# Altium PCB DevBoard.PcbDoc (part 1 of 2)
Units mil, origin at the board's own origin, x right, y up, seen from the top; angles counter-clockwise.
Board outline 3635 x 2820 mil, 4 copper layers (Top Layer, Layer 1, Layer 2, Bottom Layer), stack 22.334 mil thick; 84 components, 151 nets, 484 pads, 93 vias.
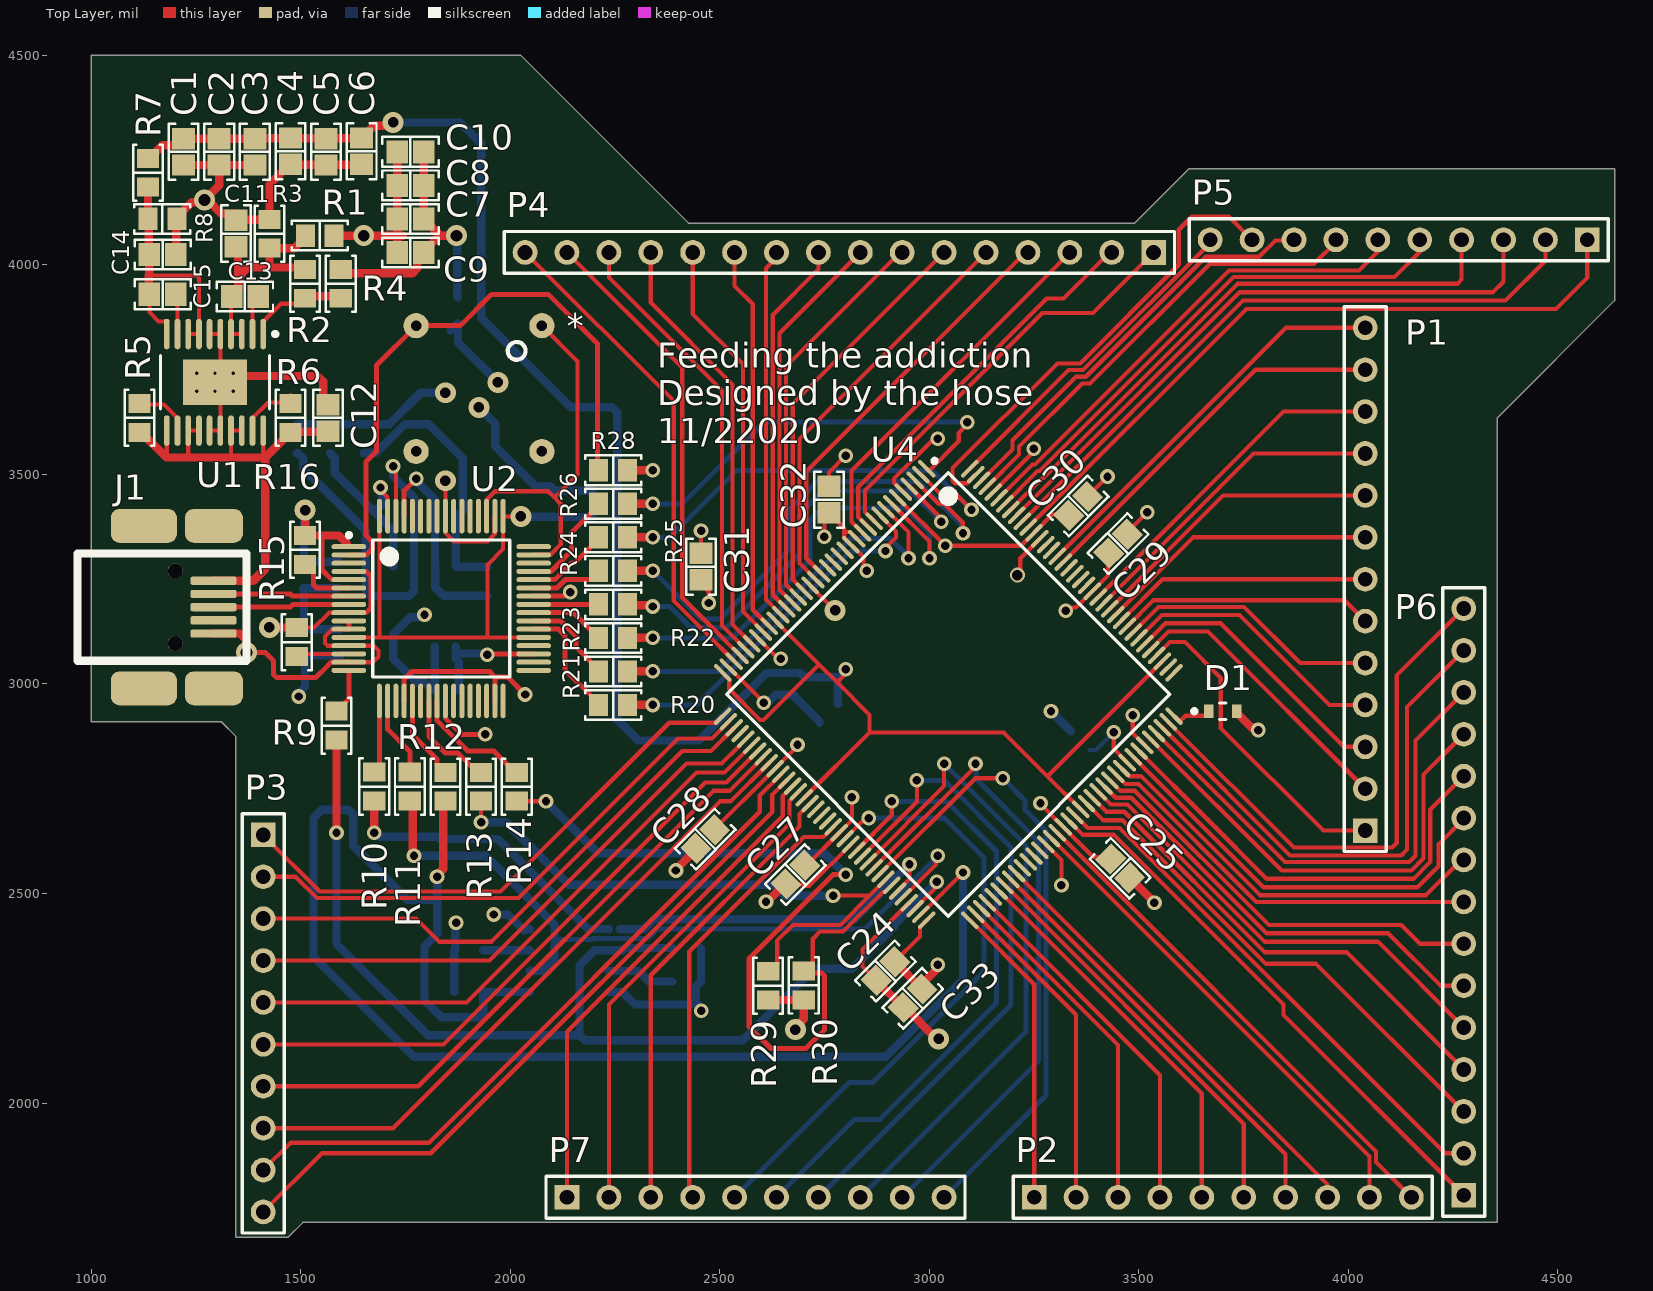
[diagram p0: Top Layer view]
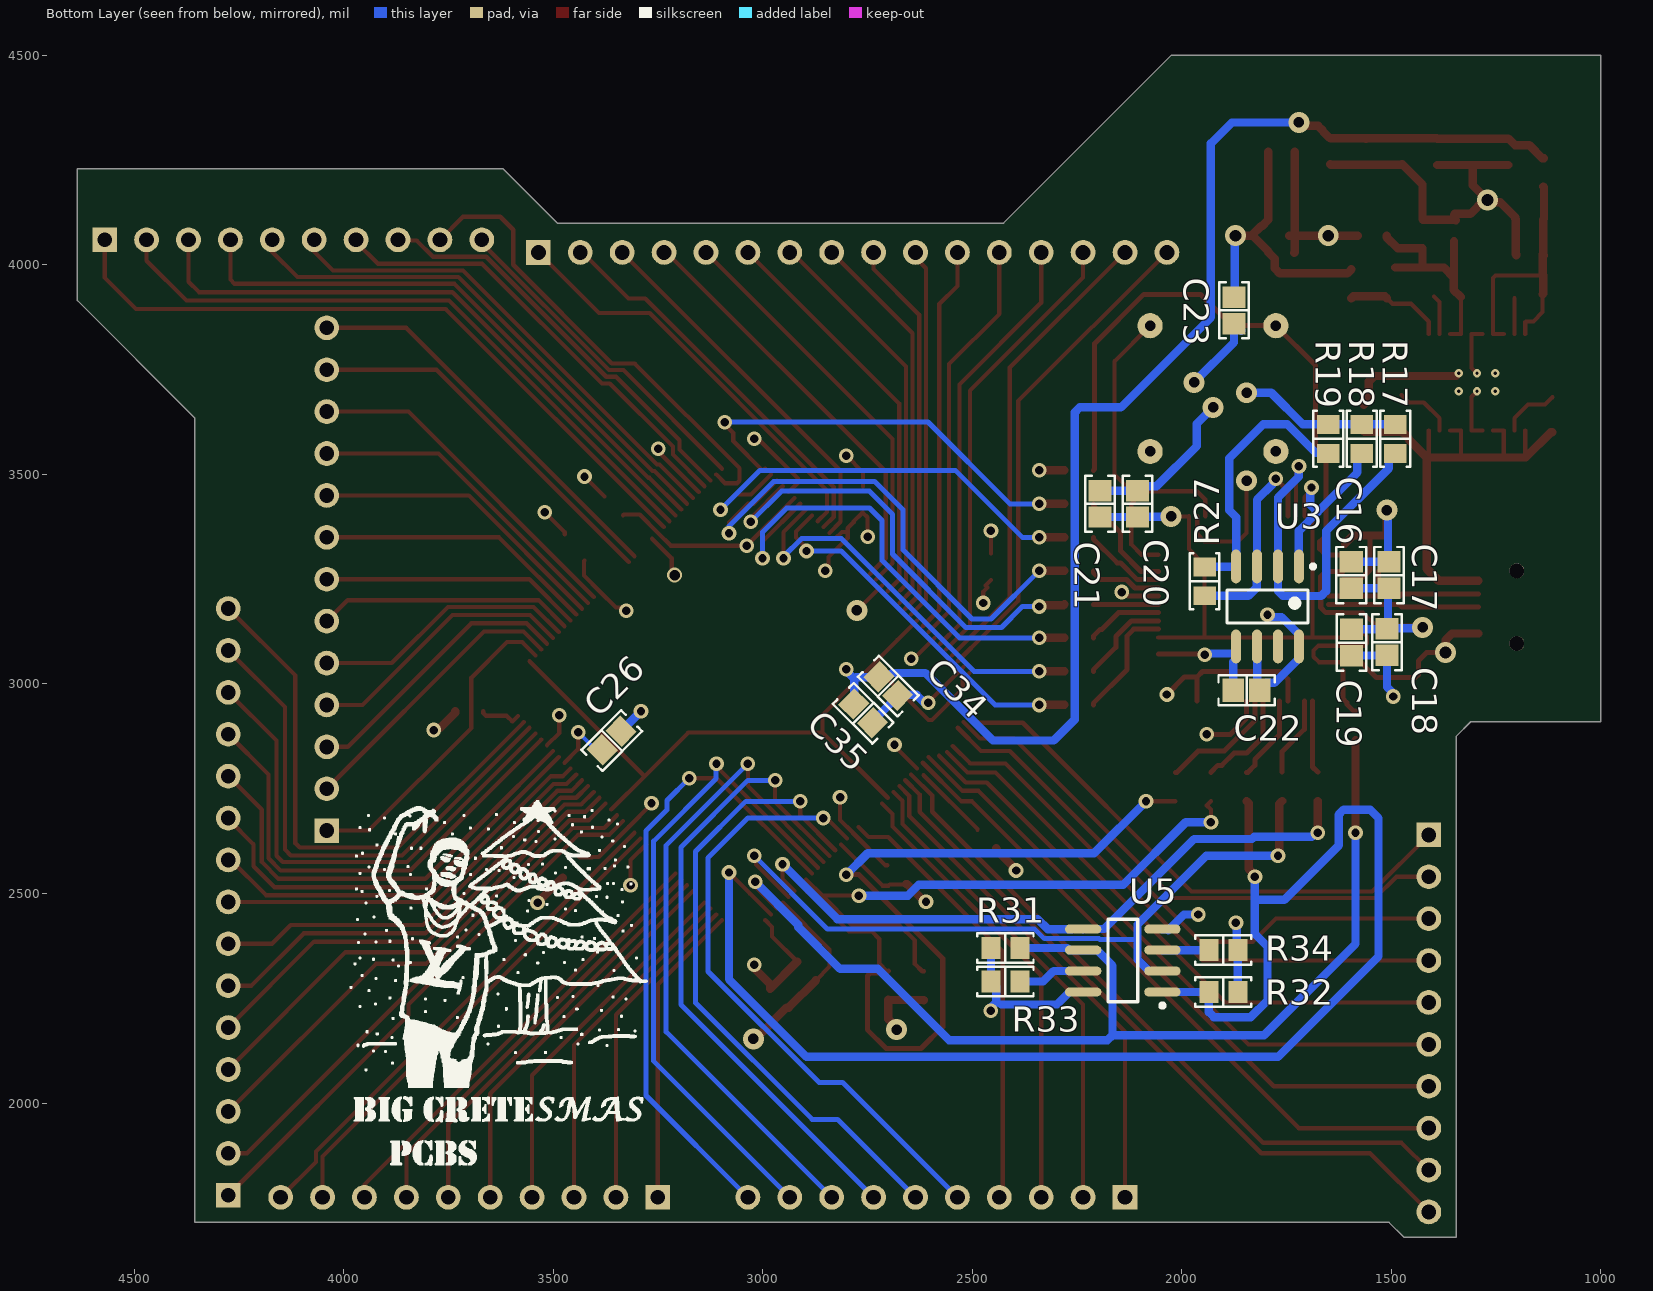
[diagram p1: Bottom Layer view, seen from below]
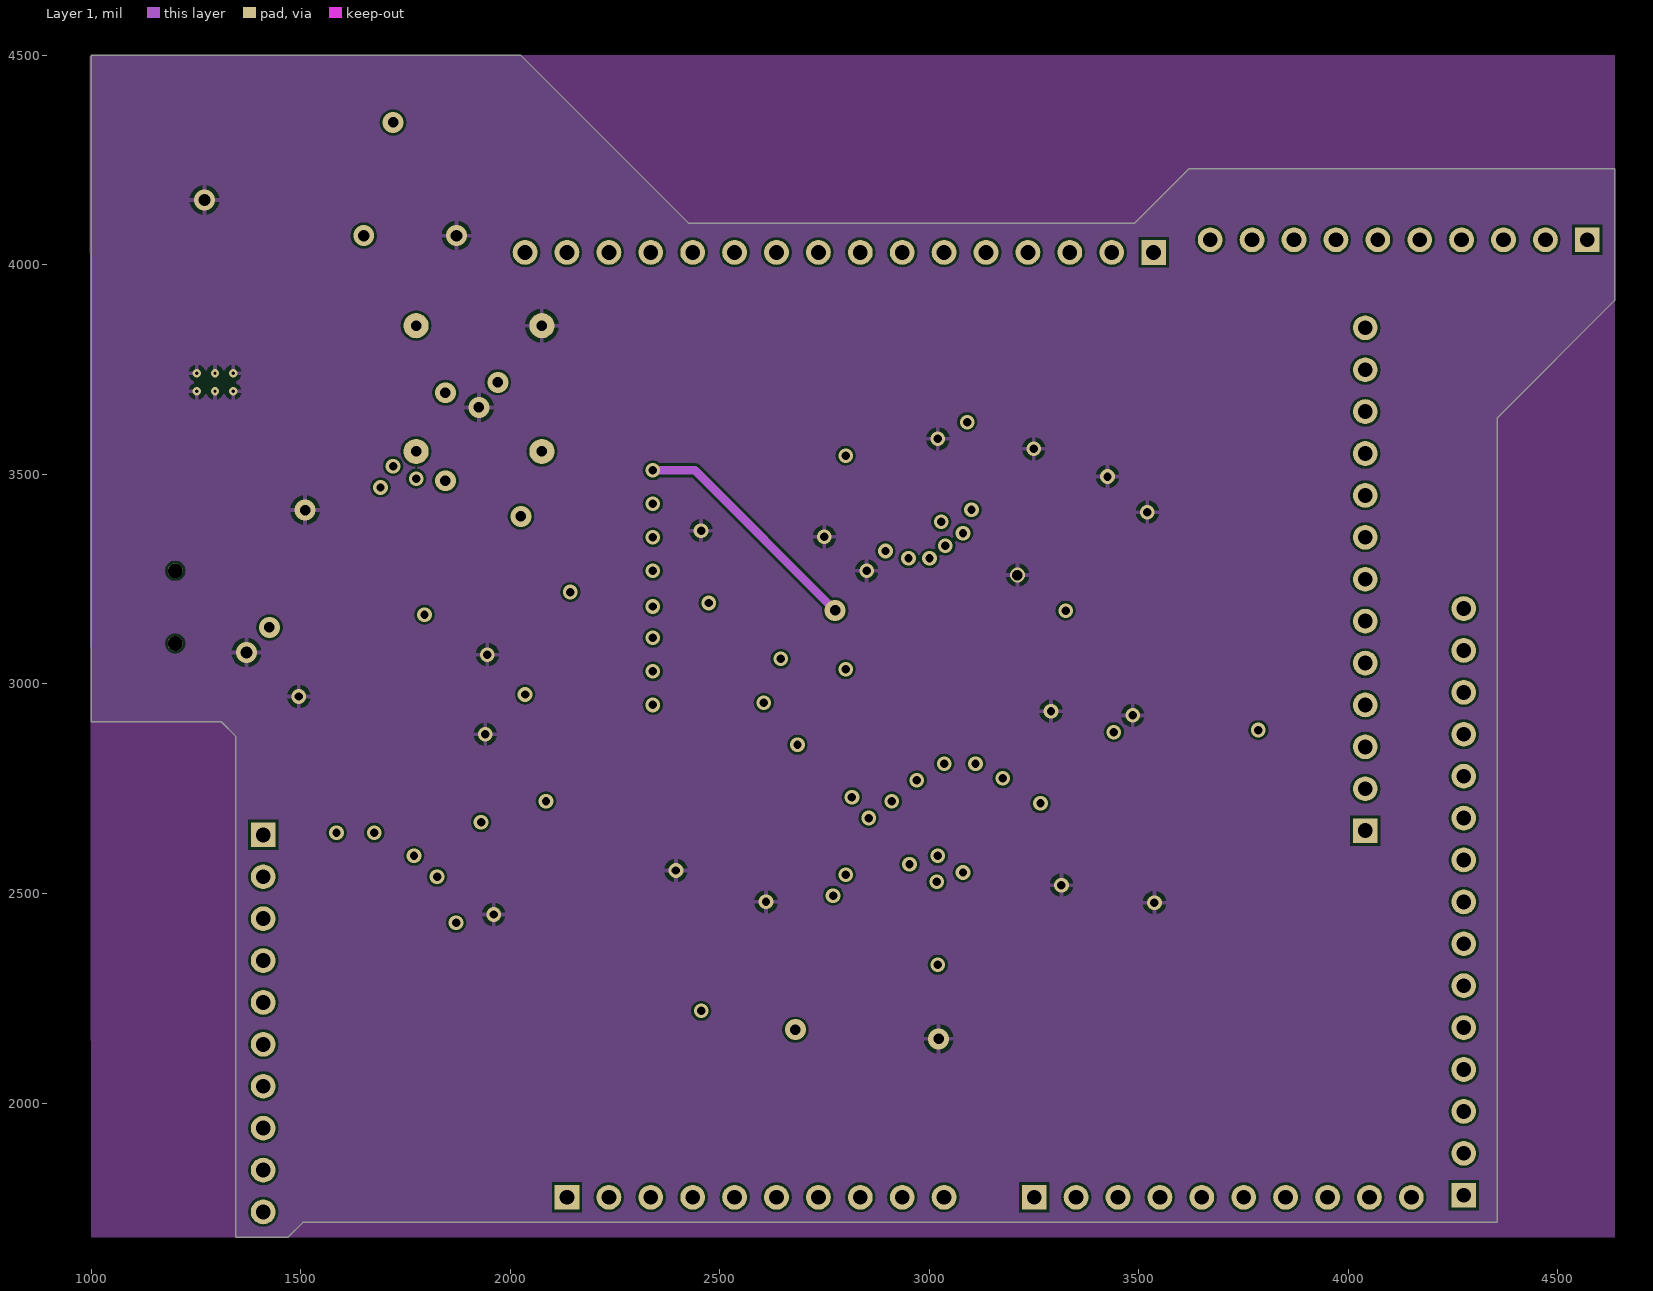
[diagram p2: Layer 1]
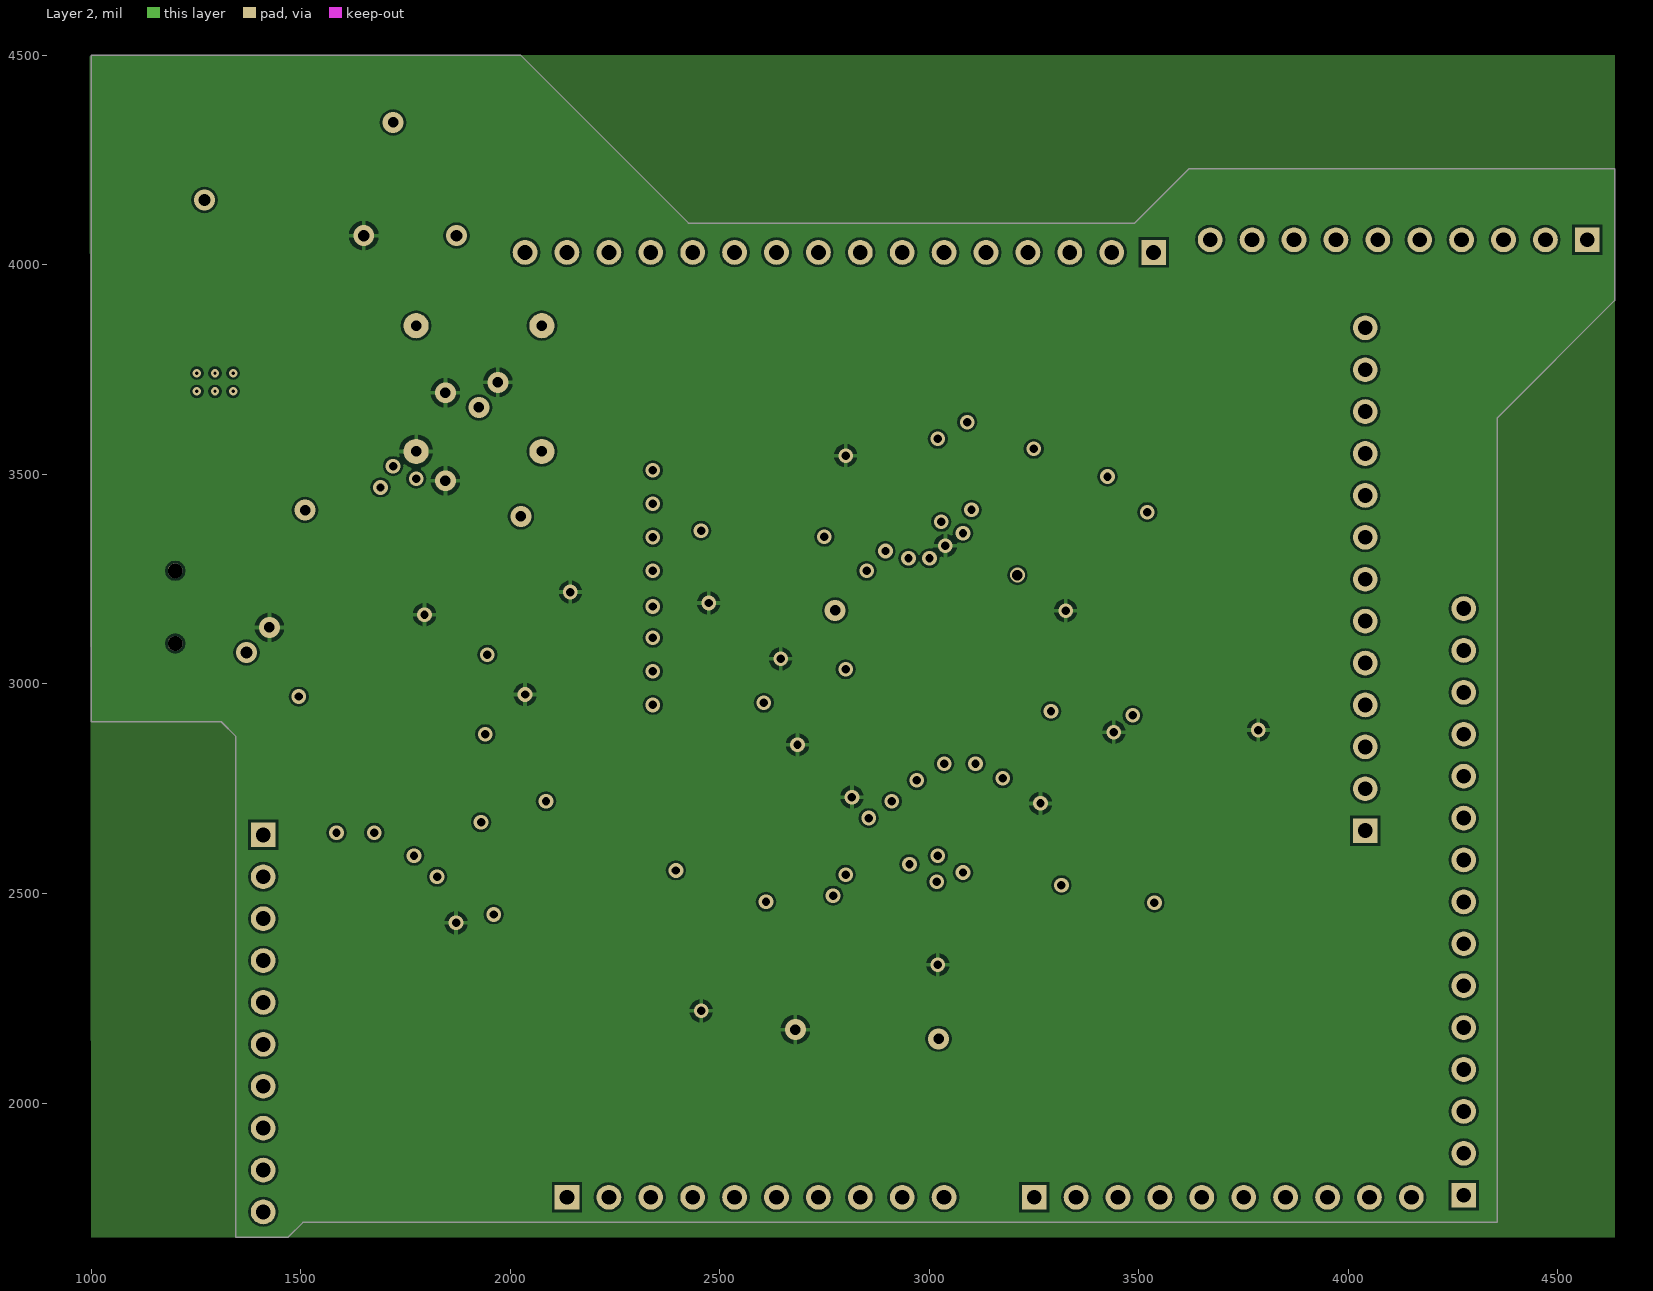
[diagram p3: Layer 2]
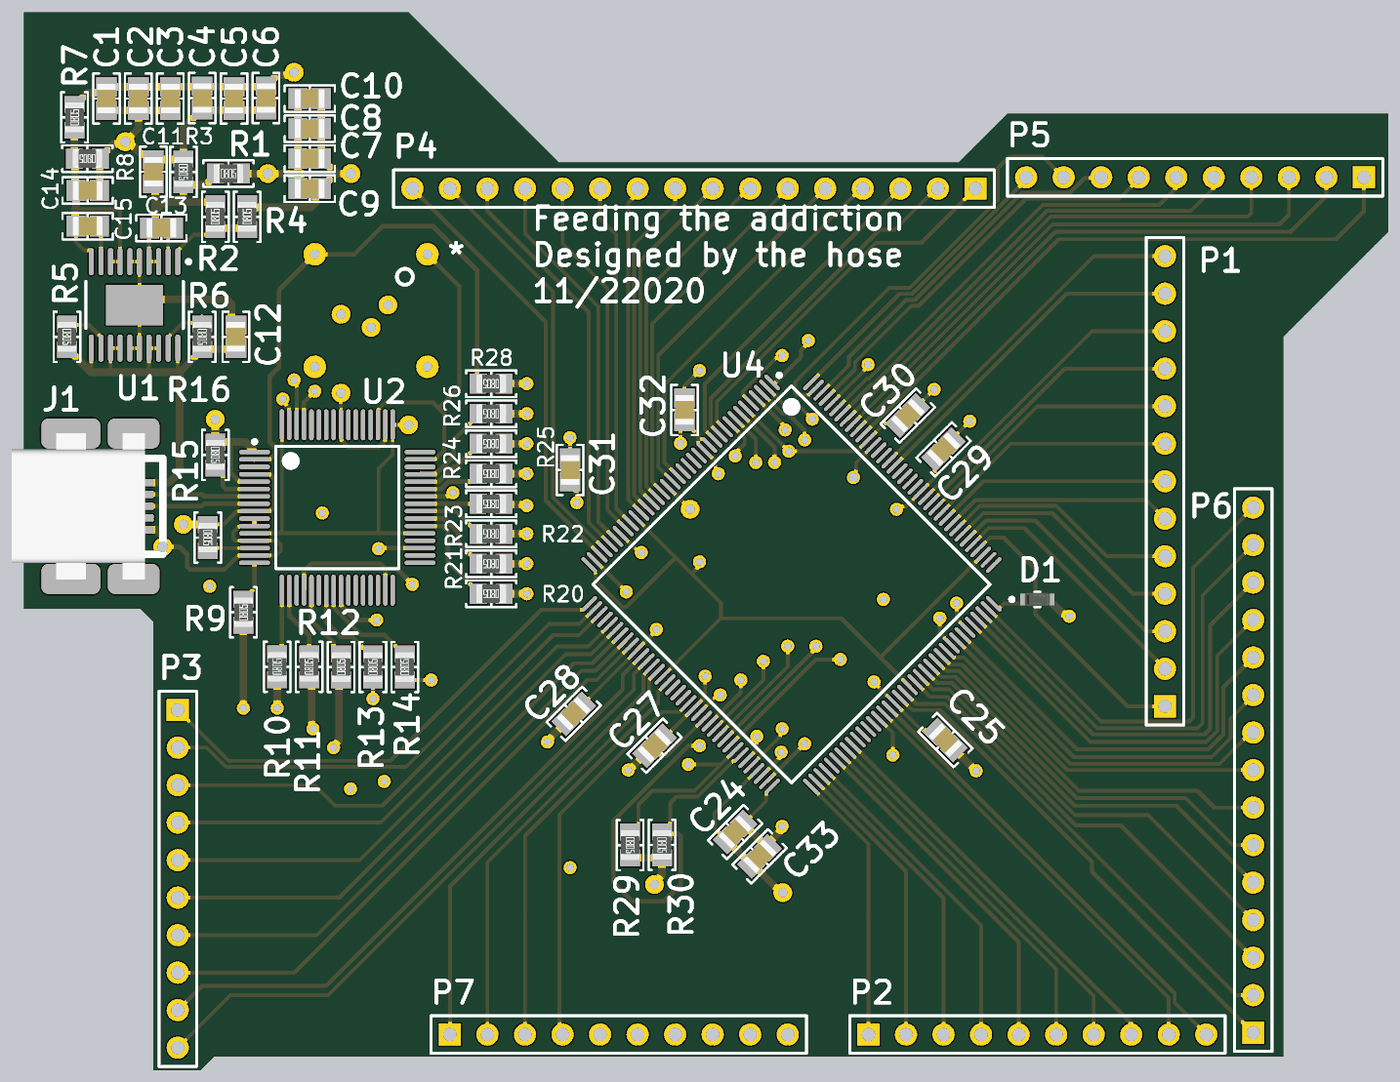
[diagram p5: 3D render of the assembled board from above, using the file's embedded part models]
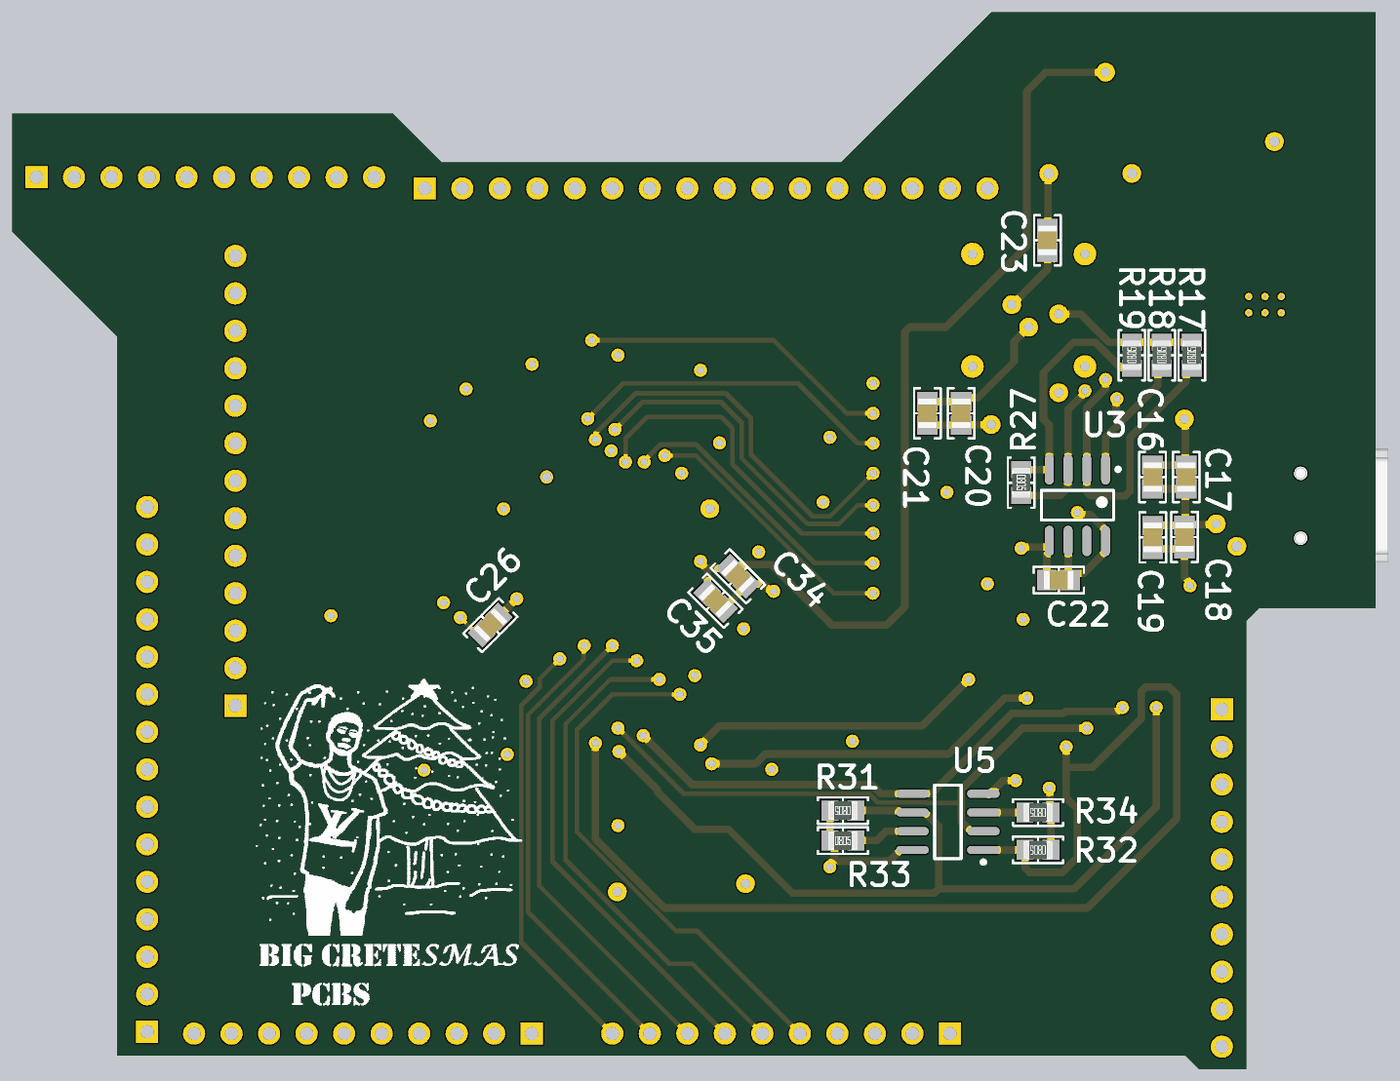
[diagram p6: 3D render of the assembled board from below, using the file's embedded part models]

## Layer stack, top to bottom
Top Solder: solder mask 0.4, Solder Resist, Dk 3.5
Top Layer: signal copper 1.378
Dielectric 2: prepreg 2.8, PP-006, Dk 4.1
Layer 1: signal copper 0.689
Dielectric 1: dielectric 12.6, FR-4, Dk 4.8
Layer 2: signal copper 0.689
Dielectric 3: prepreg 2.8, PP-006, Dk 4.1
Bottom Layer: signal copper 1.378
Bottom Solder: solder mask 0.4, Solder Resist, Dk 3.5

## Board outline
1000,4500 2025,4500 2425,4100 3490,4100 3620,4230 4635,4230 4635,3915 4355,3635 4355,1715 1505,1715 1470,1680 1345,1680 1345,2875 1310,2910 1000,2910

## Design rules (kind name [scope] priority, off if disabled: settings)
Clearance [All] p1: gap=6 ignorepadtopadclearanceinfootprint=FALSE
PolygonConnect [All] p1: connectstyle=Relief reliefconductorwidth=10 reliefentries=4 polygonreliefangle="90 Angle" airgapwidth=10
RoutingVias [All] p1: holewidth=25 width=50 viastyle="Through Hole" minholewidth=15 minwidth=30 maxholewidth=28 maxwidth=50
SolderMaskExpansion [All] p1: expansion=4 istentingtop=FALSE
Width [All] p1: maxlimit=50 minlimit=6 preferedwidth=10
30 further rules are at their usual default settings.

## Classes and differential pairs
component class "Power Delievery": C1 C2 C3 C4 C5 C6 C7 C8 C9 C10 C11 C12 C13 C14 C15 R1 R2 R3 R4 R5 R6 R7 R8 U1
component class FTDI: * C16 C17 C18 C19 C20 C21 C22 C23 R9 R10 R11 R12 R13 R14 R15 R16 R17 R18 R19 R20 R21 R22 R23 R24 R25 R26 R27 R28 U2 U3
component class FPGA: C24 C25 C26 C27 C28 C29 C30 C31 C32 C33 C34 C35 D1 R29 R30 R31 R32 R33 R34 U4 U5
component class Connectors: J1 P1 P2 P3 P4 P5 P6 P7

## Components (designator, comment, footprint, x,y, rotation, side; value= is the part's Value field where it differs from the comment)
* "ACHL-12mhz" ACHL-12mhz 1925,3705 r270 top
C1 "10µF" "CAP 0805_2012" 1220,4270 r90 top
C2 "1µF" "CAP 0805_2012" 1305,4270 r90 top
C3 "0.1µF" "CAP 0805_2012" 1390,4270 r90 top
C4 "0.1µF" "CAP 0805_2012" 1475,4271.5 r90 top
C5 "0.1µF" "CAP 0805_2012" 1560,4270 r90 top
C6 "10000pF" "CAP 0805_2012" 1645,4271.5 r270 top
C7 "10µF" "CAP 0805_2012" 1761.5,4110 r180 top
C8 "1µF" "CAP 0805_2012" 1761.5,4190 r180 top
C9 "0.1µF" "CAP 0805_2012" 1761.5,4030 r180 top
C10 "10000pF" "CAP 0805_2012" 1761.5,4270 r0 top
C11 "10µF" "CAP 0805_2012" 1345,4075 r270 top
C12 "10µF" "CAP 0805_2012" 1565,3635 r270 top
C13 "10000pF" "CAP 0805_2012" 1366.5,3925 r0 top
C14 "4.7µF" "CAP 0805_2012" 1170,4025 r180 top
C15 "10000pF" "CAP 0805_2012" 1170,3930 r0 top
C16 "0.1µF" "CAP 0805_2012" 1595,3260 r270 bottom
C17 "4.7µF" "CAP 0805_2012" 1505,3260 r270 bottom
C18 "0.1µF" "CAP 0805_2012" 1509.68,3100 r90 bottom
C19 "4.7µF" "CAP 0805_2012" 1594.35,3098.95 r90 bottom
C20 "10µF" "CAP 0805_2012" 2105,3430 r270 bottom
C21 "0.1µF" "CAP 0805_2012" 2195,3430 r270 bottom
C22 "0.1µF" "CAP 0805_2012" 1845,2985 r180 bottom
C23 "10000pF" "CAP 0805_2012" 1875,3891.5 r270 bottom
C24 "0.1µF" "CAP 0805_2012" 2895,2315 r45 top
C25 "0.1µF" "CAP 0805_2012" 3455,2560 r135 top
C26 "0.1µF" "CAP 0805_2012" 3360,2865 r315 bottom
C27 "0.1µF" "CAP 0805_2012" 2680,2545 r45 top
C28 "0.1µF" "CAP 0805_2012" 2465,2630 r45 top
C29 "0.1µF" "CAP 0805_2012" 3450,3335 r225 top
C30 "0.1µF" "CAP 0805_2012" 3355,3425 r225 top
C31 "0.1µF" "CAP 0805_2012" 2455,3280 r270 top
C32 "0.1µF" "CAP 0805_2012" 2760,3440 r90 top
C33 "0.1µF" "CAP 0805_2012" 2960,2250 r225 top
C34 "10µF" "CAP 0805_2012" 2700,2995 r45 bottom
C35 "0.1µF" "CAP 0805_2012" 2760,2930 r45 bottom
D1 "CDBU0520" FP-0603-SOD-523F-MFG 3700,2935 r0 top
J1 "67503-1020" MOLX-67503-1020_V 1291.53,3246.38 r0 top
P1 "Header 13" HDR1X13 4040,2650 r90 top
P2 "Header 10" HDR1X10 3250,1775 r0 top
P3 "Header 10" HDR1X10 1410,2640 r270 top
P4 "Header 16" HDR1X16 3535,4030 r180 top
P5 "Header 10" HDR1X10 4570,4060 r180 top
P6 "Header 15" HDR1X15 4275,1780 r90 top
P7 "Header 10" HDR1X10 2135,1775 r0 top
R1 "100 mOhms" "RES 0805_2012" 1545,4070 r0 top
R2 "357 kOhms" "RES 0805_2012" 1510,3955 r90 top
R3 "100 Ohms" "RES 0805_2012" 1425,4074.45 r270 top
R4 "210 kOhms" "RES 0805_2012" 1595,3955 r90 top
R5 "1 MOhms" "RES 0805_2012" 1115,3635 r270 top
R6 "1 MOhms" "RES 0805_2012" 1475,3635 r270 top
R7 "100 mOhms" "RES 0805_2012" 1135,4220 r90 top
R8 "100 Ohms" "RES 0805_2012" 1169.45,4110 r180 top
R9 "0 Ohms" "RES 0805_2012" 1585,2900.55 r90 top
R10 "0 Ohms" "RES 0805_2012" 1675,2755.31 r90 top
R11 "0 Ohms" "RES 0805_2012" 1760,2755.31 r90 top
R12 "0 Ohms" "RES 0805_2012" 1845,2754.76 r90 top
R13 "0 Ohms" "RES 0805_2012" 1930,2754.76 r90 top
R14 "0 Ohms" "RES 0805_2012" 2015,2754.76 r90 top
R15 "2.2 kOhms" "RES 0805_2012" 1490,3100 r270 top
R16 "12 kOhms" "RES 0805_2012" 1510,3320 r270 top
R17 "10 kOhms" "RES 0805_2012" 1490,3585 r90 bottom
R18 "10 kOhms" "RES 0805_2012" 1570,3585 r90 bottom
R19 "10 kOhms" "RES 0805_2012" 1650,3585 r90 bottom
R20 "0 Ohms" "RES 0805_2012" 2245,2950 r180 top
R21 "0 Ohms" "RES 0805_2012" 2245,3030 r180 top
R22 "0 Ohms" "RES 0805_2012" 2245,3110 r180 top
R23 "0 Ohms" "RES 0805_2012" 2245,3190 r180 top
R24 "0 Ohms" "RES 0805_2012" 2245,3270 r180 top
R25 "0 Ohms" "RES 0805_2012" 2245,3350 r180 top
R26 "0 Ohms" "RES 0805_2012" 2245,3430 r180 top
R27 "2.2 kOhms" "RES 0805_2012" 1945,3245 r270 bottom
R28 "0 Ohms" "RES 0805_2012" 2245,3510 r180 top
R29 "10 kOhms" "RES 0805_2012" 2615,2280 r270 top
R30 "10 kOhms" "RES 0805_2012" 2700,2280.55 r270 top
R31 "10 kOhms" "RES 0805_2012" 2420.32,2370 r0 bottom
R32 "10 kOhms" "RES 0805_2012" 1900.32,2265 r0 bottom
R33 "10 kOhms" "RES 0805_2012" 2420.32,2290 r180 bottom
R34 "10 kOhms" "RES 0805_2012" 1900.32,2365 r0 bottom
U1 "LT3030EFE#PBF" LT-FE-20-EPV-CB_M 1295,3720 r270 top
U2 "FT2232HL-Reel" LQFP-64_M 1835,3180 r0 top
U3 "93LC56-I/SN" MCHP-SOIC-SN8_N 1795,3185 r270 bottom
U4 "ICE40HX1K-TQ144" LATC-TQFP-144_L 3045,2975 r315 top
U5 "N25Q032A13ESC40F" MICT-SC-8_N 2140.32,2340 r0 bottom

## Footprints (in the part's own frame and the unit in brackets; to place one, negate y for a bottom-side part, rotate by r counter-clockwise, add the part's x,y. Pads: shape width x height; smd on the part's side, far side on the other; paste and mask are expansions set on the pad)
ACHL-12mhz [mil]
  round 60 hole 25: 1(150,150) 2(-150,150) 3(-150,-150) 4(150,-150)
  silkscreen extent -111,69 -69,111
"CAP 0805_2012" [mm] "Chip Capacitor, 2-Leads, Body 2.00x1.20mm, IPC Medium Density"
  rect 1.3x1.4 smd: 1(-0.8,0) 2(0.8,0)
  silkscreen extent -1.7,-0.9 1.7,0.9, body extent -1,-0.64 1,0.64, height 1.26
FP-0603-SOD-523F-MFG [mm]
  rect 0.6x0.8 smd paste+0 mask+0: 1(-0.85,0) 2(0.85,0)
  silkscreen extent -1.85,-0.5 0.18,0.5, body extent -1.25,-0.6 1.25,0.6, height 0.25
HDR1X10 [mm] "Connector; Header; 10 Position"
  rect 1.5x1.5 hole 0.9: 1(0,0)
  round 1.5 hole 0.9: 2(2.54,0) 3(5.08,0) 4(7.62,0) 5(10.16,0) 6(12.7,0) 7(15.24,0) 8(17.78,0) 9(20.32,0) 10(22.86,0)
  silkscreen extent -1.27,-1.27 24.13,1.27
HDR1X13 [mm] "Connector; Header; 13 Position"
  rect 1.5x1.5 hole 0.9: 1(0,0)
  round 1.5 hole 0.9: 2(2.54,0) 3(5.08,0) 4(7.62,0) 5(10.16,0) 6(12.7,0) 7(15.24,0) 8(17.78,0) 9(20.32,0) 10(22.86,0) 11(25.4,0) 12(27.94,0) 13(30.48,0)
  silkscreen extent -1.27,-1.27 31.75,1.27
HDR1X15 [mm] "Connector; Header; 15 Position"
  rect 1.5x1.5 hole 0.9: 1(0,0)
  round 1.5 hole 0.9: 2(2.54,0) 3(5.08,0) 4(7.62,0) 5(10.16,0) 6(12.7,0) 7(15.24,0) 8(17.78,0) 9(20.32,0) 10(22.86,0) 11(25.4,0) 12(27.94,0) 13(30.48,0) 14(33.02,0) 15(35.56,0)
  silkscreen extent -1.27,-1.27 36.83,1.27
HDR1X16 [mm] "Connector; Header; 16 Position"
  rect 1.5x1.5 hole 0.9: 1(0,0)
  round 1.5 hole 0.9: 2(2.54,0) 3(5.08,0) 4(7.62,0) 5(10.16,0) 6(12.7,0) 7(15.24,0) 8(17.78,0) 9(20.32,0) 10(22.86,0) 11(25.4,0) 12(27.94,0) 13(30.48,0) 14(33.02,0) 15(35.56,0) 16(38.1,0)
  silkscreen extent -1.27,-1.27 39.37,1.27
LATC-TQFP-144_L [mm] "QFP, 144-Leads, Body 20x20mm, Pitch 0.5mm, IPC High Density"
  oval 1.4x0.25 smd: 1(-10.6,8.75) 2(-10.6,8.25) 3(-10.6,7.75) 4(-10.6,7.25) 5(-10.6,6.75) 6(-10.6,6.25) 7(-10.6,5.75) 8(-10.6,5.25) 9(-10.6,4.75) 10(-10.6,4.25) 11(-10.6,3.75) 12(-10.6,3.25) 13(-10.6,2.75) 14(-10.6,2.25) 15(-10.6,1.75) 16(-10.6,1.25) 17(-10.6,0.75) 18(-10.6,0.25) 19(-10.6,-0.25) 20(-10.6,-0.75) 21(-10.6,-1.25) 22(-10.6,-1.75) 23(-10.6,-2.25) 24(-10.6,-2.75) 25(-10.6,-3.25) 26(-10.6,-3.75) 27(-10.6,-4.25) 28(-10.6,-4.75) 29(-10.6,-5.25) 30(-10.6,-5.75) 31(-10.6,-6.25) 32(-10.6,-6.75) 33(-10.6,-7.25) 34(-10.6,-7.75) 35(-10.6,-8.25) 36(-10.6,-8.75) 73(10.6,-8.75) 74(10.6,-8.25) 75(10.6,-7.75) 76(10.6,-7.25) 77(10.6,-6.75) 78(10.6,-6.25) 79(10.6,-5.75) 80(10.6,-5.25) 81(10.6,-4.75) 82(10.6,-4.25) 83(10.6,-3.75) 84(10.6,-3.25) 85(10.6,-2.75) 86(10.6,-2.25) 87(10.6,-1.75) 88(10.6,-1.25) 89(10.6,-0.75) 90(10.6,-0.25) 91(10.6,0.25) 92(10.6,0.75) 93(10.6,1.25) 94(10.6,1.75) 95(10.6,2.25) 96(10.6,2.75) 97(10.6,3.25) 98(10.6,3.75) 99(10.6,4.25) 100(10.6,4.75) 101(10.6,5.25) 102(10.6,5.75) 103(10.6,6.25) 104(10.6,6.75) 105(10.6,7.25) 106(10.6,7.75) 107(10.6,8.25) 108(10.6,8.75)
  oval 0.25x1.4 smd: 37(-8.75,-10.6) 38(-8.25,-10.6) 39(-7.75,-10.6) 40(-7.25,-10.6) 41(-6.75,-10.6) 42(-6.25,-10.6) 43(-5.75,-10.6) 44(-5.25,-10.6) 45(-4.75,-10.6) 46(-4.25,-10.6) 47(-3.75,-10.6) 48(-3.25,-10.6) 49(-2.75,-10.6) 50(-2.25,-10.6) 51(-1.75,-10.6) 52(-1.25,-10.6) 53(-0.75,-10.6) 54(-0.25,-10.6) 55(0.25,-10.6) 56(0.75,-10.6) 57(1.25,-10.6) 58(1.75,-10.6) 59(2.25,-10.6) 60(2.75,-10.6) 61(3.25,-10.6) 62(3.75,-10.6) 63(4.25,-10.6) 64(4.75,-10.6) 65(5.25,-10.6) 66(5.75,-10.6) 67(6.25,-10.6) 68(6.75,-10.6) 69(7.25,-10.6) 70(7.75,-10.6) 71(8.25,-10.6) 72(8.75,-10.6) 109(8.75,10.6) 110(8.25,10.6) 111(7.75,10.6) 112(7.25,10.6) 113(6.75,10.6) 114(6.25,10.6) 115(5.75,10.6) 116(5.25,10.6) 117(4.75,10.6) 118(4.25,10.6) 119(3.75,10.6) 120(3.25,10.6) 121(2.75,10.6) 122(2.25,10.6) 123(1.75,10.6) 124(1.25,10.6) 125(0.75,10.6) 126(0.25,10.6) 127(-0.25,10.6) 128(-0.75,10.6) 129(-1.25,10.6) 130(-1.75,10.6) 131(-2.25,10.6) 132(-2.75,10.6) 133(-3.25,10.6) 134(-3.75,10.6) 135(-4.25,10.6) 136(-4.75,10.6) 137(-5.25,10.6) 138(-5.75,10.6) 139(-6.25,10.6) 140(-6.75,10.6) 141(-7.25,10.6) 142(-7.75,10.6) 143(-8.25,10.6) 144(-8.75,10.6)
  silkscreen extent -10.72,-9.5 9.5,9.55, body extent -10,-10 10,10, height 1.6
LQFP-64_M [mm] "Thin QFP, 64-Leads, Body 10x10mm, Pitch 0.5mm, IPC Low Density"
  oval 2.1x0.3 smd: 1(-5.6,3.75) 2(-5.6,3.25) 3(-5.6,2.75) 4(-5.6,2.25) 5(-5.6,1.75) 6(-5.6,1.25) 7(-5.6,0.75) 8(-5.6,0.25) 9(-5.6,-0.25) 10(-5.6,-0.75) 11(-5.6,-1.25) 12(-5.6,-1.75) 13(-5.6,-2.25) 14(-5.6,-2.75) 15(-5.6,-3.25) 16(-5.6,-3.75) 33(5.6,-3.75) 34(5.6,-3.25) 35(5.6,-2.75) 36(5.6,-2.25) 37(5.6,-1.75) 38(5.6,-1.25) 39(5.6,-0.75) 40(5.6,-0.25) 41(5.6,0.25) 42(5.6,0.75) 43(5.6,1.25) 44(5.6,1.75) 45(5.6,2.25) 46(5.6,2.75) 47(5.6,3.25) 48(5.6,3.75)
  oval 0.3x2.1 smd: 17(-3.75,-5.6) 18(-3.25,-5.6) 19(-2.75,-5.6) 20(-2.25,-5.6) 21(-1.75,-5.6) 22(-1.25,-5.6) 23(-0.75,-5.6) 24(-0.25,-5.6) 25(0.25,-5.6) 26(0.75,-5.6) 27(1.25,-5.6) 28(1.75,-5.6) 29(2.25,-5.6) 30(2.75,-5.6) 31(3.25,-5.6) 32(3.75,-5.6) 49(3.75,5.6) 50(3.25,5.6) 51(2.75,5.6) 52(2.25,5.6) 53(1.75,5.6) 54(1.25,5.6) 55(0.75,5.6) 56(0.25,5.6) 57(-0.25,5.6) 58(-0.75,5.6) 59(-1.25,5.6) 60(-1.75,5.6) 61(-2.25,5.6) 62(-2.75,5.6) 63(-3.25,5.6) 64(-3.75,5.6)
  silkscreen extent -5.72,-4.15 4.15,4.57, body extent -5,-5 5,5, height 1.6
LT-FE-20-EPV-CB_M [mm] "SOP, 20-Leads, Body 6.6x4.5mm, Pitch 0.65mm, Thermal Pad 3.86x2.74mm, IPC Low Density"
  oval 1.85x0.35 smd: 1(-2.925,2.925) 2(-2.925,2.275) 3(-2.925,1.625) 4(-2.925,0.975) 5(-2.925,0.325) 6(-2.925,-0.325) 7(-2.925,-0.975) 8(-2.925,-1.625) 9(-2.925,-2.275) 10(-2.925,-2.925) 11(2.925,-2.925) 12(2.925,-2.275) 13(2.925,-1.625) 14(2.925,-0.975) 15(2.925,-0.325) 16(2.925,0.325) 17(2.925,0.975) 18(2.925,1.625) 19(2.925,2.275) 20(2.925,2.925)
  rect 2.74x3.86 smd: 21(0,0)
  silkscreen extent -3.05,-3.3 1.6,3.78, body extent -2.25,-3.3 2.25,3.3, height 1.2
MCHP-SOIC-SN8_N [mm] "SOIC, 8-Leads, Body 4.9x3.9mm, Pitch 1.27mm, IPC Medium Density"
  oval 2.05x0.6 smd: 1(-2.425,1.905) 2(-2.425,0.635) 3(-2.425,-0.635) 4(-2.425,-1.905) 5(2.425,-1.905) 6(2.425,-0.635) 7(2.425,0.635) 8(2.425,1.905)
  silkscreen extent -2.55,-2.45 1,2.88, body extent -1.95,-2.45 1.95,2.45, height 1.75
MICT-SC-8_N [mm] "SOIC, 8-Leads, Body 5x4mm, Pitch 1.27mm, IPC Medium Density"
  oval 2.2x0.55 smd: 1(-2.4,1.905) 2(-2.4,0.635) 3(-2.4,-0.635) 4(-2.4,-1.905) 5(2.4,-1.905) 6(2.4,-0.635) 7(2.4,0.635) 8(2.4,1.905)
  silkscreen extent -2.52,-2.5 0.9,2.85, body extent -2,-2.5 2,2.5, height 0.1
MOLX-67503-1020_V [mm] "Mini USB Connector, SMT, Righer Angle"
  rrect50% 2.8x0.5 smd: 1(0,0) 2(0,-0.8) 3(0,-1.6) 4(0,-2.4) 5(0,-3.2)
  rrect50% 3.5x2.05 smd: 6(0.025,3.325) 8(0.025,-6.525)
  rrect50% 4x2.05 smd: 7(-4.225,3.325) 9(-4.225,-6.525)
  round 0.9 hole 0.9 unplated: X(-2.325,-3.8) Y(-2.325,0.6)
  silkscreen extent -8.25,-4.85 2,1.65, body extent -8.22,-6.56 0.78,3.34, height 3.95
"RES 0805_2012" [mm] "Chip Resistor, 2-Leads, Body 2.00x1.25mm, IPC Medium Density"
  rect 1.15x1.35 smd: 1(-0.875,0) 2(0.875,0)
  silkscreen extent -1.7,-0.9 1.7,0.9, body extent -1,-0.62 1,0.63, height 0.6

## Part data
C1 C7 C11 C12 C20 C34: library part CL21A106KOQNNNG, "CAP CER 10UF 16V X5R 0805", Device Package="0805 (2012 Metric)", Manufacturer="Samsung Electro-Mechanics", Operating Temperature="-55°C ~ 85°C", Supplier Part Number 1=1276-6455-1-ND, Temperature Coefficient=X5R, Tolerance=±10%, Voltage - Rated=16V, Applications="General Purpose", Capacitance=10µF, ComponentLink1Description=Datasheet, ComponentLink1URL=http://www.samsungsem.com/kr/support/product-search/mlcc/CL21A106KOQNNNG.jsp, ComponentLink2Description="DigiKey Link", ComponentLink2URL=http://digikey.com/product-detail/en/samsung-electro-mechanics/CL21A106KOQNNNG/1276-6455-1-ND/5958083, LastUpdated="9/2/2020 1:04:35 AM", Lifecycle Status=Active, Minimum Order=1, Mounting Type="Surface Mount, MLCC", Package / Case="0805 (2012 Metric)", Packaging=TapeAndReel, Part Number=CL21A106KOQNNNG, Part Status=Active, PartId=6236, Price=0.02, Series=CL, Size / Dimension="0.079\" L x 0.049\" W (2.00mm x 1.25mm)", Supplier 1=DigiKey, Thickness (Max)="0.055\" (1.40mm)"
C2 C8: library part CL21B105KAFNNNE, "CAP CER 1UF 25V X7R 0805", Device Package="0805 (2012 Metric)", Manufacturer="Samsung Electro-Mechanics", Operating Temperature="-55°C ~ 125°C", Supplier Part Number 1=1276-1066-1-ND, Temperature Coefficient=X7R, Tolerance=±10%, Voltage - Rated=25V, Applications="General Purpose", Capacitance=1µF, ComponentLink1Description=Datasheet, ComponentLink1URL=http://www.samsungsem.com/kr/support/product-search/mlcc/CL21B105KAFNNNE.jsp, ComponentLink2Description="DigiKey Link", ComponentLink2URL=http://digikey.com/product-detail/en/samsung-electro-mechanics/CL21B105KAFNNNE/1276-1066-1-ND/3889152, LastUpdated="9/2/2020 1:04:35 AM", Lifecycle Status=Active, Minimum Order=1, Mounting Type="Surface Mount, MLCC", Package / Case="0805 (2012 Metric)", Packaging=TapeAndReel, Part Number=CL21B105KAFNNNE, Part Status=Active, PartId=6211, Price=0.02, Series=CL, Size / Dimension="0.079\" L x 0.049\" W (2.00mm x 1.25mm)", Supplier 1=DigiKey, Thickness (Max)="0.053\" (1.35mm)"
C3 C4 C5 C9 C16 C18 C21 C22 C24 C25 C26 C27 C28 C29 C30 C31 C32 C33 C35: library part CL21B104KBCNNNC, "CAP CER 0.1UF 50V X7R 0805", Device Package="0805 (2012 Metric)", Manufacturer="Samsung Electro-Mechanics", Operating Temperature="-55°C ~ 125°C", Supplier Part Number 1=1276-1003-1-ND, Temperature Coefficient=X7R, Tolerance=±10%, Voltage - Rated=50V, Applications="General Purpose", Capacitance=0.1µF, ComponentLink1Description=Datasheet, ComponentLink1URL=http://www.samsungsem.com/kr/support/product-search/mlcc/CL21B104KBCNNNC.jsp, ComponentLink2Description="DigiKey Link", ComponentLink2URL=http://digikey.com/product-detail/en/samsung-electro-mechanics/CL21B104KBCNNNC/1276-1003-1-ND/3889089, LastUpdated="9/2/2020 1:04:35 AM", Lifecycle Status=Active, Minimum Order=1, Mounting Type="Surface Mount, MLCC", Package / Case="0805 (2012 Metric)", Packaging=TapeAndReel, Part Number=CL21B104KBCNNNC, Part Status=Active, PartId=6201, Price=0.01, Series=CL, Size / Dimension="0.079\" L x 0.049\" W (2.00mm x 1.25mm)", Supplier 1=DigiKey, Thickness (Max)="0.037\" (0.95mm)"
C6 C10 C13 C15 C23: library part CL21B103KBANNNC, "CAP CER 10000PF 50V X7R 0805", Device Package="0805 (2012 Metric)", Manufacturer="Samsung Electro-Mechanics", Operating Temperature="-55°C ~ 125°C", Supplier Part Number 1=1276-1015-1-ND, Temperature Coefficient=X7R, Tolerance=±10%, Voltage - Rated=50V, Applications="General Purpose", Capacitance=10000pF, ComponentLink1Description=Datasheet, ComponentLink1URL=http://www.samsungsem.com/kr/support/product-search/mlcc/CL21B103KBANNNC.jsp, ComponentLink2Description="DigiKey Link", ComponentLink2URL=http://digikey.com/product-detail/en/samsung-electro-mechanics/CL21B103KBANNNC/1276-1015-1-ND/3889101, LastUpdated="9/2/2020 1:04:35 AM", Lifecycle Status=Active, Minimum Order=1, Mounting Type="Surface Mount, MLCC", Package / Case="0805 (2012 Metric)", Packaging=TapeAndReel, Part Number=CL21B103KBANNNC, Part Status=Active, PartId=6199, Price=0.01, Series=CL, Size / Dimension="0.079\" L x 0.049\" W (2.00mm x 1.25mm)", Supplier 1=DigiKey, Thickness (Max)="0.030\" (0.75mm)"
C14 C17 C19: library part CL21A475KAQNNNE, "CAP CER 4.7UF 25V X5R 0805", Device Package="0805 (2012 Metric)", Manufacturer="Samsung Electro-Mechanics", Operating Temperature="-55°C ~ 85°C", Supplier Part Number 1=1276-1244-1-ND, Temperature Coefficient=X5R, Tolerance=±10%, Voltage - Rated=25V, Applications="General Purpose", Capacitance=4.7µF, ComponentLink1Description=Datasheet, ComponentLink1URL=http://www.samsungsem.com/kr/support/product-search/mlcc/CL21A475KAQNNNE.jsp, ComponentLink2Description="DigiKey Link", ComponentLink2URL=http://digikey.com/product-detail/en/samsung-electro-mechanics/CL21A475KAQNNNE/1276-1244-1-ND/3889330, LastUpdated="9/2/2020 1:04:19 AM", Lifecycle Status=Active, Minimum Order=1, Mounting Type="Surface Mount, MLCC", Package / Case="0805 (2012 Metric)", Packaging=TapeAndReel, Part Number=CL21A475KAQNNNE, Part Status=Active, PartId=14321, Price=0.03, Series=CL, Size / Dimension="0.079\" L x 0.049\" W (2.00mm x 1.25mm)", Supplier 1=DigiKey, Thickness (Max)="0.055\" (1.40mm)"
D1: library part CMP-20227-000003-1, "DIODE SCHOTTKY 20V 500MA 0603", Average Rectified Current=500mA, Case/Package=SMD/SMT, Max Reverse Leakage Current=100uA, Max Reverse Voltage (DC)=20V, Max Surge Current=2A, Package Quantity=1, Mount="Surface Mount", Packaging="Tape and Reel"
J1: library part CMP-0411-00002-1, "USB, MINI, SMD, RA KME04-USBMU03A01", Manufacturer=Molex, ComponentLink1Description="Manufacturer URL", ComponentLink1URL=http://www.molex.com/, ComponentLink2Description=Datasheet, ComponentLink2URL=http://www.molex.com/pdm_docs/sd/675031020_sd.pdf, DatasheetVersion="Rev F, 06/2009", Mounting Technology="Surface Mount", PackageDescription="Mini USB Connector, SMT, Righer Angle", PackageReference=67503-1020, PartNumber=67503-1020, Terminal Pitch="0.8 mm"
P1: "Header, 13-Pin", LatestRevisionDate=17-Jul-2002, LatestRevisionNote="Re-released for DXP Platform.", Publisher="Altium Limited"
P2 P3 P5 P7: "Header, 10-Pin", LatestRevisionDate=17-Jul-2002, LatestRevisionNote="Re-released for DXP Platform.", Publisher="Altium Limited"
P4: "Header, 16-Pin", LatestRevisionDate=17-Jul-2002, LatestRevisionNote="Re-released for DXP Platform.", Publisher="Altium Limited"
P6: "Header, 15-Pin", LatestRevisionDate=17-Jul-2002, LatestRevisionNote="Re-released for DXP Platform.", Publisher="Altium Limited"
R1 R7: library part RL1220S-R10-F, "RES 0.1 OHM 1% 1/3W 0805", Device Package="0805 (2012 Metric)", Manufacturer=Susumu, Operating Temperature="-55°C ~ 125°C", Power (Watts)="0.333W, 1/3W", Supplier Device Package=0805, Supplier Part Number 1=RL12S.10FCT-ND, Temperature Coefficient="0/ +200ppm/°C", Tolerance=±1%, ComponentLink1Description=Datasheet, ComponentLink1URL=http://www.susumu.co.jp/common/pdf/n_catalog_partition08_en.pdf, ComponentLink2Description="DigiKey Link", ComponentLink2URL=http://digikey.com/product-detail/en/susumu/RL1220S-R10-F/RL12S.10FCT-ND/433019, Composition="Thin Film", Features="Current Sense", Height - Seated (Max)="0.020\" (0.50mm)", LastUpdated="9/2/2020 1:15:23 AM", Lifecycle Status=Active, Minimum Order=1, Number of Terminations=2, Package / Case="0805 (2012 Metric)", Packaging=TapeAndReel, Part Number=RL1220S-R10-F, Part Status=Active, PartId=28050, Price=0.03, Resistance="100 mOhms", Series=RL, Size / Dimension="0.079\" L x 0.049\" W (2.00mm x 1.25mm)", Supplier 1=DigiKey
R2: library part ERJ-6ENF3573V, "RES SMD 357K OHM 1% 1/8W 0805", Device Package="0805 (2012 Metric)", Manufacturer="Panasonic Electronic Components", Operating Temperature="-55°C ~ 155°C", Power (Watts)="0.125W, 1/8W", Ratings=AEC-Q200, Supplier Device Package=0805, Supplier Part Number 1=P357KCCT-ND, Temperature Coefficient=±100ppm/°C, Tolerance=±1%, ComponentLink1Description=Datasheet, ComponentLink1URL=https://industrial.panasonic.com/cdbs/www-data/pdf/RDA0000/AOA0000C304.pdf, ComponentLink2Description="DigiKey Link", ComponentLink2URL=http://digikey.com/product-detail/en/panasonic-electronic-components/ERJ-6ENF3573V/P357KCCT-ND/119709, Composition="Thick Film", Features="Automotive AEC-Q200", Height - Seated (Max)="0.028\" (0.70mm)", LastUpdated="9/2/2020 1:14:35 AM", Lifecycle Status=Active, Minimum Order=1, Number of Terminations=2, Package / Case="0805 (2012 Metric)", Packaging=TapeAndReel, Part Number=ERJ-6ENF3573V, Part Status=Active, PartId=47845, Price=0.01, Resistance="357 kOhms", Series=ERJ, Size / Dimension="0.079\" L x 0.049\" W (2.00mm x 1.25mm)", Supplier 1=DigiKey
R3 R8: library part RNCP0805FTD100R, "RES 100 OHM 1% 1/4W 0805", Device Package="0805 (2012 Metric)", Manufacturer="Stackpole Electronics Inc", Operating Temperature="-55°C ~ 155°C", Power (Watts)="0.25W, 1/4W", Supplier Device Package=0805, Supplier Part Number 1=RNCP0805FTD100RCT-ND, Temperature Coefficient=±100ppm/°C, Tolerance=±1%, ComponentLink1Description=Datasheet, ComponentLink1URL=https://www.seielect.com/catalog/sei-rncp.pdf, ComponentLink2Description="DigiKey Link", ComponentLink2URL=http://digikey.com/product-detail/en/stackpole-electronics-inc/RNCP0805FTD100R/RNCP0805FTD100RCT-ND/2240548, Composition="Thin Film", Features="Anti-Sulfur, Moisture Resistant", Height - Seated (Max)="0.024\" (0.60mm)", LastUpdated="9/2/2020 1:15:14 AM", Lifecycle Status=Active, Minimum Order=1, Number of Terminations=2, Package / Case="0805 (2012 Metric)", Packaging=TapeAndReel, Part Number=RNCP0805FTD100R, Part Status=Active, PartId=32189, Price=0.01, Resistance="100 Ohms", Series=RNCP, Size / Dimension="0.079\" L x 0.049\" W (2.00mm x 1.25mm)", Supplier 1=DigiKey
R4: library part ERJ-6ENF2103V, "RES SMD 210K OHM 1% 1/8W 0805", Device Package="0805 (2012 Metric)", Manufacturer="Panasonic Electronic Components", Operating Temperature="-55°C ~ 155°C", Power (Watts)="0.125W, 1/8W", Ratings=AEC-Q200, Supplier Device Package=0805, Supplier Part Number 1=P210KCCT-ND, Temperature Coefficient=±100ppm/°C, Tolerance=±1%, ComponentLink1Description=Datasheet, ComponentLink1URL=https://industrial.panasonic.com/cdbs/www-data/pdf/RDA0000/AOA0000C304.pdf, ComponentLink2Description="DigiKey Link", ComponentLink2URL=http://digikey.com/product-detail/en/panasonic-electronic-components/ERJ-6ENF2103V/P210KCCT-ND/119643, Composition="Thick Film", Features="Automotive AEC-Q200", Height - Seated (Max)="0.028\" (0.70mm)", LastUpdated="9/2/2020 1:14:42 AM", Lifecycle Status=Active, Minimum Order=1, Number of Terminations=2, Package / Case="0805 (2012 Metric)", Packaging=TapeAndReel, Part Number=ERJ-6ENF2103V, Part Status=Active, PartId=46340, Price=0.01, Resistance="210 kOhms", Series=ERJ, Size / Dimension="0.079\" L x 0.049\" W (2.00mm x 1.25mm)", Supplier 1=DigiKey
R5 R6: library part RMCF0805FG1M00, "RES 1M OHM 1% 1/8W 0805", Device Package="0805 (2012 Metric)", Manufacturer="Stackpole Electronics Inc", Operating Temperature="-55°C ~ 155°C", Power (Watts)="0.125W, 1/8W", Ratings=AEC-Q200, Supplier Device Package=0805, Supplier Part Number 1=RMCF0805FG1M00CT-ND, Temperature Coefficient=±100ppm/°C, Tolerance=±1%, ComponentLink1Description=Datasheet, ComponentLink1URL=https://www.seielect.com/catalog/sei-rmcf_rmcp.pdf, ComponentLink2Description="DigiKey Link", ComponentLink2URL=http://digikey.com/product-detail/en/stackpole-electronics-inc/RMCF0805FG1M00/RMCF0805FG1M00CT-ND/4425150, Composition="Thick Film", Features="Automotive AEC-Q200", Height - Seated (Max)="0.026\" (0.65mm)", LastUpdated="9/2/2020 1:14:43 AM", Lifecycle Status=Active, Minimum Order=1, Number of Terminations=2, Package / Case="0805 (2012 Metric)", Packaging=CutTape, Part Number=RMCF0805FG1M00, Part Status=Active, PartId=46208, Price=0.10, Resistance="1 MOhms", Series=RMCF, Size / Dimension="0.079\" L x 0.049\" W (2.00mm x 1.25mm)", Supplier 1=DigiKey
R9 R10 R11 R12 R13 R14 R20 R21 R22 R23 R24 R25 R26 R28: library part RMCF0805ZT0R00, "RES 0 OHM JUMPER 1/8W 0805", Device Package="0805 (2012 Metric)", Manufacturer="Stackpole Electronics Inc", Operating Temperature="-55°C ~ 155°C", Power (Watts)="0.125W, 1/8W", Ratings=AEC-Q200, Supplier Device Package=0805, Supplier Part Number 1=RMCF0805ZT0R00CT-ND, Tolerance=Jumper, ComponentLink1Description=Datasheet, ComponentLink1URL=https://www.seielect.com/catalog/sei-packaging.pdf, ComponentLink2Description="DigiKey Link", ComponentLink2URL=http://digikey.com/product-detail/en/stackpole-electronics-inc/RMCF0805ZT0R00/RMCF0805ZT0R00CT-ND/1942606, Composition="Thick Film", Features="Automotive AEC-Q200", Height - Seated (Max)="0.026\" (0.65mm)", LastUpdated="9/2/2020 1:14:43 AM", Lifecycle Status=Active, Minimum Order=1, Number of Terminations=2, Package / Case="0805 (2012 Metric)", Packaging=CutTape, Part Number=RMCF0805ZT0R00, Part Status=Active, PartId=46079, Price=0.10, Resistance="0 Ohms", Series=RMCF, Size / Dimension="0.079\" L x 0.049\" W (2.00mm x 1.25mm)", Supplier 1=DigiKey
R15 R27: library part ESR10EZPJ222, "RES SMD 2.2K OHM 5% 0.4W 0805", Device Package="0805 (2012 Metric)", Manufacturer="Rohm Semiconductor", Operating Temperature="-55°C ~ 155°C", Power (Watts)="0.4W, 2/5W", Ratings=AEC-Q200, Supplier Device Package=0805, Supplier Part Number 1=RHM2.2KKCT-ND, Temperature Coefficient=±200ppm/°C, Tolerance=±5%, ComponentLink1Description=Datasheet, ComponentLink1URL=https://www.rohm.com/datasheet/ESR01MZPF/esr-e, ComponentLink2Description="DigiKey Link", ComponentLink2URL=http://digikey.com/product-detail/en/rohm-semiconductor/ESR10EZPJ222/RHM2.2KKCT-ND/1762991, Composition="Thick Film", Features="Automotive AEC-Q200, Pulse Withstanding", Height - Seated (Max)="0.026\" (0.65mm)", LastUpdated="9/2/2020 1:15:14 AM", Lifecycle Status=Active, Minimum Order=1, Number of Terminations=2, Package / Case="0805 (2012 Metric)", Packaging=TapeAndReel, Part Number=ESR10EZPJ222, Part Status=Active, PartId=32275, Price=0.01, Resistance="2.2 kOhms", Series=ESR, Size / Dimension="0.079\" L x 0.049\" W (2.00mm x 1.25mm)", Supplier 1=DigiKey
R16: library part CRG0805F12K, "RES SMD 12K OHM 1% 1/8W 0805", Device Package="0805 (2012 Metric)", Manufacturer="TE Connectivity Passive Product", Operating Temperature="-55°C ~ 155°C", Power (Watts)="0.125W, 1/8W", Supplier Device Package=0805, Supplier Part Number 1=A126337CT-ND, Temperature Coefficient=±100ppm/°C, Tolerance=±1%, ComponentLink1Description=Datasheet, ComponentLink1URL=https://www.te.com/commerce/DocumentDelivery/DDEController?Action=srchrtrv&DocNm=1773204&DocType=DS&DocLang=English, ComponentLink2Description="DigiKey Link", ComponentLink2URL=http://digikey.com/product-detail/en/te-connectivity-passive-product/CRG0805F12K/A126337CT-ND/7603392, Composition="Thick Film", Height - Seated (Max)="0.026\" (0.65mm)", LastUpdated="9/2/2020 1:14:43 AM", Lifecycle Status=Active, Minimum Order=1, Number of Terminations=2, Package / Case="0805 (2012 Metric)", Packaging=TapeAndReel, Part Number=CRG0805F12K, Part Status=Active, PartId=46149, Price=0.01, Resistance="12 kOhms", Series="CRG, Neohm", Size / Dimension="0.079\" L x 0.049\" W (2.00mm x 1.25mm)", Supplier 1=DigiKey
R17 R18 R19 R29 R30 R31 R32 R33 R34: library part RNCP0805FTD10K0, "RES 10K OHM 1% 1/4W 0805", Device Package="0805 (2012 Metric)", Manufacturer="Stackpole Electronics Inc", Operating Temperature="-55°C ~ 155°C", Power (Watts)="0.25W, 1/4W", Supplier Device Package=0805, Supplier Part Number 1=RNCP0805FTD10K0CT-ND, Temperature Coefficient=±100ppm/°C, Tolerance=±1%, ComponentLink1Description=Datasheet, ComponentLink1URL=https://www.seielect.com/catalog/sei-rncp.pdf, ComponentLink2Description="DigiKey Link", ComponentLink2URL=http://digikey.com/product-detail/en/stackpole-electronics-inc/RNCP0805FTD10K0/RNCP0805FTD10K0CT-ND/2240601, Composition="Thin Film", Features="Anti-Sulfur, Moisture Resistant", Height - Seated (Max)="0.024\" (0.60mm)", LastUpdated="9/2/2020 1:15:23 AM", Lifecycle Status=Active, Minimum Order=1, Number of Terminations=2, Package / Case="0805 (2012 Metric)", Packaging=TapeAndReel, Part Number=RNCP0805FTD10K0, Part Status=Active, PartId=28021, Price=0.01, Resistance="10 kOhms", Series=RNCP, Size / Dimension="0.079\" L x 0.049\" W (2.00mm x 1.25mm)", Supplier 1=DigiKey
U1: library part CMP-0476-00593-1, "Dual 750 mA / 250 mA Low Dropout, Low Noise, Micropower Linear Regulator, 1.7 to 20 V Vin, Adjustable Vout, 20-pin SOP (FE-20-EPV-CB), -40 to 125 degC, Pb-Free", Dropout Voltage(V)=0.3, Manufacturer="Linear Technology", Output Voltage=Adj, ComponentLink1Description="Manufacturer URL", ComponentLink1URL=http://www.linear.com/, ComponentLink2Description=Datasheet, ComponentLink2URL=http://cds.linear.com/docs/en/datasheet/3030fa.pdf, ComponentLink3Description="Package Specification", ComponentLink3URL=http://cds.linear.com/docs/en/packaging/05081663__J_FE20(CB).pdf, DatasheetVersion="Rev. A", Discrete Pass Element=no, Iout(mA)=750, Isupply(mA)=15, Mounting Technology="Surface Mount", Noise(uV)=20, Number of Outputs=2, PackageDescription="20-Pin Plastic TSSOP, Body 6.5 x 4.4 mm, Pitch 0.65 mm", PackageReference=FE-20, PackageVersion="Rev. I, 05/2011", PartNumber=LT3030EFE#PBF, PSRR(dB)=60, RoHS=TRUE, Shutdown Current(uA)=0.3, Vin Max(V)=20, Vin Min(V)=1.7, Vout Max(V)=19.5, Vout Min(V)=1.22
U2: library part CMP-0078-00023-3, "Dual High Speed USB To Multipurpose UART/FIFO IC, 64-pin LQFP, Tape and Reel", Manufacturer=FTDI, ComponentLink1Description="Manufacturer URL", ComponentLink1URL=http://www.ftdichip.com/, ComponentLink2Description=Datasheet, ComponentLink2URL=http://www.ftdichip.com/Support/Documents/DataSheets/ICs/DS_FT2232H.pdf, DatasheetVersion="ver 2.21, Jun-2012", PackageDescription="64-Pin Thin Quad Flat Pack, 10 x 10 x 1.4 mm Body, 0.5 mm Pitch", PackageReference=LQFP-64, PackageVersion=Jun-12, PartNumber=FT2232HL-Reel, RevisionNote="DatasheetVersion updated to 2.21 Jun-2012"
U3: library part CMP-0162-00635-1, "2K bits Microwire Serial EEPROM, 2.5 to 5.5 V, 2 MHz, -40 to 85 degC, 8-pin SOIC (SN8), Tube", Manufacturer=Microchip, ComponentLink1Description="Manufacturer URL", ComponentLink1URL=http://www.microchip.com, ComponentLink2Description=Datasheet, ComponentLink2URL=http://ww1.microchip.com/downloads/en/DeviceDoc/21712B.pdf, ComponentLink3Description="Package Specification", ComponentLink3URL=http://www.microchip.com/stellent/groups/techpub_sg/documents/packagingspec/en012702.pdf, ComponentLink4Description="Product URL", ComponentLink4URL=http://www.microchip.com/93LC56, DatasheetVersion="Rev. B", Mounting Technology="Surface Mount", PackageDescription="8-Lead Plastic Small Outline, 4.9 x 3.9 mm Body, 1.27 mm Pitch", PackageReference=SOIC-SN8, PackageVersion=C04-057C, PartNumber=93LC56-I/SN
U4: library part CMP-0962-00009-1, "iCE40 HX1K Series FPGA Family, 1280 Logic Cells, 1.2 V Core, 64 K Embedded RAM Bits, 144-pin TQFP, Pb-Free, Tray", Manufacturer="Lattice Semiconductor", Supply Voltage=1.2V, ComponentLink1Description="Manufacturer URL", ComponentLink1URL=http://www.latticesemi.com/en, ComponentLink2Description=Datasheet, ComponentLink2URL=http://www.latticesemi.com/~/media/Documents/DataSheets/iCE/iCE40LPHXFamilyDataSheet.pdf, ComponentLink3Description="Package Specification", ComponentLink3URL=http://www.latticesemi.com/lit/docs/package/pkg.pdf, DatasheetVersion="Rev. 02.9", Embedded RAM Bits=64K, Logic Cells=1280, Mounting Technology="Surface Mount", PackageDescription="144-Pin Thin Quad Flat Package, Body 20 x 20 mm, Pitch 0.5 mm", PackageReference=TQFP-144, PackageVersion="Rev. 03.9, 02/2013", Packing=Tray, PartNumber=ICE40HX1K-TQ144, Phase-Locked Loops=1, RoHS=TRUE
U5: library part CMP-0357-00152-1, "32 Mb (x1/x2/x4) Serial NOR Flash Memory with Multi I/O, 108 MHz, 2.7 to 3.6 V, 8-pin SO8 Narrow (SC), Tape & Reel", Manufacturer=Micron, Package="SO8 NarrowÂ", Voltage=2.7V-3.6VÂ, Applications=EmbeddedÂ, ComponentLink1Description="Manufacturer URL", ComponentLink1URL=http://www.micron.com/, ComponentLink2Description=Datasheet, ComponentLink2URL=http://www.micron.com/~/media/Documents/Products/Data%20Sheet/NOR%20Flash/Serial%20NOR/N25Q/n25q_32mb_3v_65nm.pdf, ComponentLink3Description="Package Specification", ComponentLink3URL=http://www.micron.com/~/media/Documents/Products/Data%20Sheet/NOR%20Flash/Serial%20NOR/N25Q/n25q_32mb_3v_65nm.pdf, DatasheetVersion="Rev. G", Density=32MbÂ, Mounting Technology="Surface Mount", PackageDescription="8-Pin SO Narrow, 3.9 X 4.9 mm, Pitch 1.27 mm", PackageReference=MICT-SC-8, PackageVersion="Rev. E", Part Family=N25QÂ, Part Status=ProductionÂ, PartNumber=N25Q032A13ESC40F, RoHS=YesÂ, Speed="108 MHzÂ", Type="Multi I/OÂ", Width=x1/x2/x4Â

## Via types
v1: diameter 35, hole 20, Top Layer to Bottom Layer, 71 vias
v2: diameter 50, hole 25, Top Layer to Bottom Layer, 11 vias
v3: diameter 19.68, hole 7.87, Top Layer to Bottom Layer, 6 vias
v4: diameter 50, hole 28, Top Layer to Bottom Layer, 4 vias
v5: diameter 35, hole 25, Top Layer to Bottom Layer, 1 vias

## Nets (pads, with @x,y where several pads share a name; then routed paths per layer and width w, separated by ;. In a path a pad name is that pad's centre, name@x,y a point inside that pad or via, vN(x,y) a via of type N, cw(c..) or ccw(c..) an arc to the next point about the centre after c; other vN are vias at no path point)
GND: *.2 C1.1 C2.1 C3.1 C4.1 C5.1 C6.2 C7.1 C8.1 C9.1 C10.2 C11.1 C12.1 C14.1 C16.1 C17.1 C18.1 C19.1 C20.1 C21.1 C22.1 C23.1 C24.1 C25.1 C26.1 C27.1 C28.1 C29.1 C30.1 C31.1 C32.1 C33.2 J1.5 R3.1 R4.2 R8.1 R16.1 U1.5 U1.6 U1.15 U1.16 U1.21 U2.1 U2.5 U2.10 U2.11 U2.13 U2.15 U2.25 U2.35 U2.47 U2.51 U3.5 U4.5 U4.13 U4.14 U4.59 U4.69 U4.86 U4.103 U4.132 U4.140 U5.4 | length 7496.4
  Top Layer w10: U1.15@1282.2,3604.84 U1.16@1307.8,3604.84 1307.8,3685.55 v3(1295,3698.35) ; U1.6@1282.2,3835.16 U1.5@1307.8,3835.16 1307.8,3754.45 v3(1295,3741.65) ; U2.15@1614.53,3052.05 1672.05,3052.05 1685,3065 1685,3080 1673.58,3091.42 1563.58,3091.42 1557.72,3097.28 1557.72,3113.64 1574.53,3130.44 1614.18,3130.44 U2.11@1614.53,3130.79 ; U2.51@1943.27,3400.47 1943.61,3400.82 1943.61,3440.47 1963.14,3460 2090,3460 2105,3445 ; U2.47@2055.47,3307.95 2055.82,3308.3 2095.47,3308.3 2120,3332.82 2120,3430 2105,3445 ; *.2@2075,3855 2160,3770 2160,3500 2105,3445 ; C31.1@2455,3311.5 v1(2455,3366.04) ; C27.1@2657.73,2522.73 2659.12,2521.34 2696.46,2521.34 2699.11,2518.69 2713.96,2518.69 U4.59@2812.55,2617.27 ; v1(2749.28,3351.12) 2749.28,3397.79 C32.1@2760,3408.5 2761.97,3408.5 2782.56,3387.91 2782.56,3385.94 2796.65,3371.85 2796.65,3361.38 ; U4.13@2826.47,3346.65 2810.57,3362.54 2797.82,3362.54 2796.65,3361.38 ; v1(2850,3270) 2842.35,3277.65 2842.35,3302.82 2812.55,3332.62 U4.14@2812.55,3332.73 2796.65,3348.63 2796.65,3361.38 ; C24.1@2872.73,2292.73 2840,2325.46 2840,2366.34 U4.69@2951.74,2478.08 ; U4.5@2937.82,3458 2915.55,3480.28 2915.55,3490.26 3005.5,3580.22 3015.22,3580.22 v1(3020,3585) ; U4.140@3152.18,3458 3152.18,3458.12 3248.94,3554.88 v1(3248.94,3561.05) ; v5(3210,3260) 3216.89,3266.89 3216.89,3300 U4.132@3263.53,3346.65 ; U4.86@3277.45,2617.27 3315,2579.73 v1(3315,2520) ; C30.1@3377.27,3447.27 v1(3425,3495) ; C29.1@3472.27,3357.27 3472.27,3362.27 v1(3520,3410) ; v1(3485,2925) 3485,2883.1 3514.08,2854.01 U4.103@3514.08,2853.9
  Top Layer w12: v4(1370,3075) 1415,3075 1435,3055 1435,3022.03 1442.03,3015 1535,3015 1565,3045 1571.93,3051.95 1614.43,3051.95 U2.15@1614.53,3052.05 ; 1550.28,3354.45 1550.28,3272.08 1573.36,3248.99 1614.43,3248.99 U2.5@1614.53,3248.9 ; U2.11@1614.53,3130.79 U2.10@1614.53,3150.47 ; U2.25@1844.84,2959.53 1844.84,2918.46 1883.3,2880 v1(1940,2880) ; v1(1945,3070) 1946.73,3071.73 U2.35@2055.47,3071.73
  Top Layer w20: C14.1@1201.5,4023.03 C14.1@1201.5,4025 1202.7,4026.2 1202.7,4108.8 R8.1@1203.9,4110 1203.9,4113.94 1239.22,4149.26 1264.26,4149.26 v4(1270,4155) ; C1.1@1220,4238.5 C2.1@1305,4238.5 ; J1.5@1291.53,3120.39 1354.61,3120.39 1370,3105 v4(1370,3075) ; v3(1338.31,3741.65) 1344.96,3735 1540,3735 1552.91,3722.09 1552.91,3678.58 C12.1@1565,3666.5 ; C11.1@1345,4106.5 1346.2,4107.7 1423.8,4107.7 R3.1@1425,4108.9 1425,4191.97 1473.03,4240 C4.1@1475,4240 1475.75,4239.25 1559.25,4239.25 C5.1@1560,4238.5 1560.75,4239.25 1644.25,4239.25 C6.2@1645,4240 ; C11.1@1350,4120 1347.91,4122.09 1311.03,4122.09 1278.12,4155 v4(1270,4155) ; C3.1@1390,4238.5 C2.1@1305,4238.5 ; v2(1510,3415) R16.1@1510,3354.45 1550.28,3354.45 1590.55,3354.45 1610,3335 ; R4.2@1595,3989.45 1604.45,3980 1765.69,3980 1777.4,3991.72 1777.4,4014.41 C9.1@1792.99,4030 1792.99,4031.97 1831.02,4070 1832.99,4070 ; C10.2@1792.99,4270 C8.1@1792.99,4190 C7.1@1792.99,4110 1792.99,4108.03 1808.58,4092.44 1810.55,4092.44 1832.99,4070 ; v4(1871.5,4070) 1832.99,4070 ; v1(2395,2555) 2395,2557.5 2442.73,2605.23 C28.1@2442.73,2607.73 ; v1(2610,2480) 2612.5,2480 2655.23,2522.73 C27.1@2657.73,2522.73 ; C24.1@2872.73,2292.73 C33.2@2937.73,2227.73 2942.5,2227.73 3016.95,2153.28 v2(3021.72,2153.28) ; C25.1@3477.27,2537.73 v1(3536.94,2478.06) ; v4(1270,4155) 1305,4190 C2.1@1305,4238.5
  Bottom Layer w20: v1(1495,2970) 1495,2978.12 1509.68,2992.8 C18.1@1509.68,3068.5 1510.21,3067.98 1593.83,3067.98 C19.1@1594.35,3067.45 ; v2(1510,3415) 1507.5,3412.5 1507.5,3294 C17.1@1505,3291.5 C16.1@1590,3291.5 ; U3.5@1870,3089.53 U3.5@1870,3074.54 ; v4(1871.5,4070) 1873.25,4068.25 1873.25,3924.74 C23.1@1875,3922.99 ; C22.1@1876.5,2985 1876.5,3053.51 1870,3060 U3.5@1870,3074.54 ; v2(1925,3660) 1963.73,3621.27 1963.73,3567.99 2059.82,3471.89 2094.6,3471.89 C20.1@2105,3461.5 C21.1@2195,3461.5 ; v1(1945,3070) 1942.13,3072.87 1871.67,3072.87 U3.5@1870,3074.54 ; v1(1960,2450) 1994.18,2450 2031.97,2412.22 2031.97,2414.24 2045.06,2414.24 U5.4@2045.83,2415 ; v1(3290,2935) C26.1@3337.73,2887.27
  other v3: 1251.69,3698.35 1338.31,3698.35 1251.69,3741.65
Net*_3: *.3 R28.2 U2.2 | length 1466.3
  Top Layer w12: U2.2@1614.53,3307.95 1614.62,3308.05 1655.69,3308.05 1670.36,3322.72 1670.36,3339.64 1655,3355 1655,3530 1680,3555 1680,3760 *.3@1775,3855 1880,3855 1955,3930 2090,3930 2207.45,3812.55 2207.45,3513.1 R28.2@2210.55,3510
Net*_4: *.4 C7.2 C8.2 C9.2 C10.1 C16.2 C17.2 C18.2 C19.2 C22.2 C23.2 C24.2 C25.2 C26.2 C27.2 C28.2 C29.2 C30.2 C31.2 C32.2 C33.1 D1.2 R1.2 R15.1 R17.2 R18.2 R19.2 R29.2 R30.2 R31.2 R32.1 R33.1 R34.1 U2.4 U2.9 U2.20 U2.31 U2.42 U2.50 U2.56 U3.6 U3.8 U4.6 U4.30 U4.46 U4.57 U4.72 U4.89 U4.100 U4.123 U4.133 U5.8 | length 5772.7
  Top Layer w10: R15.1@1489.45,3135 R15.1@1490,3134.45 1531.57,3134.45 1566.94,3169.81 1614.18,3169.81 U2.9@1614.53,3170.16 ; v2(1845,3485) 1844.92,3484.92 1844.92,3400.55 U2.56@1844.84,3400.47 1845.19,3400.13 1845.19,3360.47 1865.66,3340 1945,3340 1962.61,3357.61 1962.61,3400.13 U2.50@1962.95,3400.47 ; C31.2@2455,3248.5 2468.17,3235.34 2463.17,3230.34 2473.17,3220.34 v1(2473.17,3193.17) ; C28.2@2487.27,2652.27 2487.27,2653.79 U4.46@2615.7,2782.22 ; U4.30@2589.83,3110.02 2589.95,3110.02 2639.96,3060 v1(2645,3060) ; U4.46@2631.59,2798.22 2631.59,2798.33 2685,2851.74 v1(2685,2855) ; C27.2@2702.27,2567.27 2706.87,2567.27 U4.57@2784.71,2645.11 2784.71,2645.22 2815,2675.51 v1(2815,2730) ; C32.2@2760,3471.5 2760,3505 v1(2800,3545) ; C24.2@2917.27,2337.27 2977.6,2397.6 2977.6,2420.42 U4.72@2993.5,2436.32 ; U4.6@2923.9,3444.08 2924.01,3444.08 v1(3038.1,3330) 3218.94,3330 3249.5,3360.57 U4.133@3249.62,3360.57 3293.17,3404.12 3331.34,3404.12 C30.2@3332.73,3402.73 ; v1(3265,2715) 3265,2713.35 3319.21,2659.14 U4.89@3319.21,2659.03 3390.97,2587.27 3405.83,2587.27 3407.22,2585.88 3436.34,2585.88 C25.2@3437.73,2587.27 ; v1(3325,3175) 3332.65,3182.65 3350.09,3182.65 U4.123@3388.81,3221.37 3426.39,3258.96 3426.39,3293.61 C29.2@3425,3295 ; v1(3440,2885) 3440,2844.47 U4.100@3472.33,2812.14
  Top Layer w12: U2.9@1614.53,3170.16 1614.62,3170.25 1655.69,3170.25 1667.87,3182.43 1667.87,3256.31 1655.69,3268.49 1614.62,3268.49 U2.4@1614.53,3268.58 ; U2.20@1746.42,2959.53 1746.51,2959.62 1746.51,3011.51 1765.03,3030.03 1774.97,3030.03 ; 1775,3030 1950,3030 1962.95,3017.05 ; U2.31@1962.95,2959.53 1962.95,3017.05 ; v1(2035,2975) 1992.95,3017.05 1962.95,3017.05 ; U2.42@2055.47,3209.53 2055.57,3209.43 2127.97,3209.43 2137.88,3219.34 v1(2143.15,3219.34)
  Top Layer w20: v2(1425,3135) 1425.28,3134.72 1489.17,3134.72 R15.1@1489.45,3135 ; R1.2@1579.45,4070 v4(1650,4070) 1730,4070 ; C10.1@1730,4270 C8.2@1730,4190 C7.2@1730,4110 1730,4070 ; C9.2@1730.75,4029.25 C9.2@1730,4030 1730,4070 ; 1743.5,4070 1730,4070 ; R29.2@2615,2245.55 2615.28,2245.83 2699.72,2245.83 R30.2@2700,2246.1 2700,2200.57 2680,2180.57 v2(2680,2175) ; C24.2@2917.27,2337.27 C33.1@2982.27,2272.27 2982.27,2284.15 3020,2321.88 v1(3020,2330) ; D1.2@3733.46,2935 3733.46,2931.06 3768.79,2895.74 3779.26,2895.74 v1(3785,2890)
  Bottom Layer w10: C26.2@3382.27,2842.73 3397.73,2842.73 v1(3440,2885)
  Bottom Layer w20: v2(1425,3135) 1426.75,3133.25 C18.2@1507.93,3133.25 ; R17.2@1490,3619.45 R18.2@1570,3619.45 R19.2@1650,3619.45 1710.46,3619.45 1786.01,3695 v2(1845,3695) ; C16.2@1590,3228.5 C17.2@1505,3228.5 1507.34,3226.16 1507.34,3133.84 C18.2@1507.93,3133.25 ; C19.2@1594.35,3130.44 1593.83,3130.97 1510.21,3130.97 C18.2@1509.68,3131.5 C18.2@1507.93,3133.25 ; v1(1795,3165.31) 1789.26,3159.57 1761.5,3159.57 1720,3118.07 U3.8@1720,3089.53 1720,3060.98 1778.42,3002.56 1797.91,3002.56 1813.5,2986.97 C22.2@1813.5,2985 1819.31,2990.8 1819.31,3088.83 U3.6@1820,3089.53 ; C23.2@1857.44,3842.44 1857.44,3844.41 1870.53,3857.5 C23.2@1872.5,3857.5 ; R32.1@1865.87,2265 R34.1@1865.87,2365 1868.09,2367.22 1868.09,2427.78 v1(1870.32,2430) ; C23.2@1875,3860 1875,3815 v2(1970,3720) ; U5.8@2234.8,2265 2267.28,2265 2297.28,2235 2430.32,2235 ; R31.2@2454.76,2370 R33.1@2454.76,2290 2442.13,2277.36 2442.13,2241.31 2455.32,2228.12 v1(2455.32,2220)